# Altium PCB ATmega328P design.PcbDoc
Units mm, origin at the board's own origin, x right, y up, seen from the top; angles counter-clockwise.
Board outline 40.02 x 50 mm, 2 copper layers (Top Layer, Bottom Layer), stack 1.671 mm thick; 30 components, 36 nets, 144 pads, 48 vias.
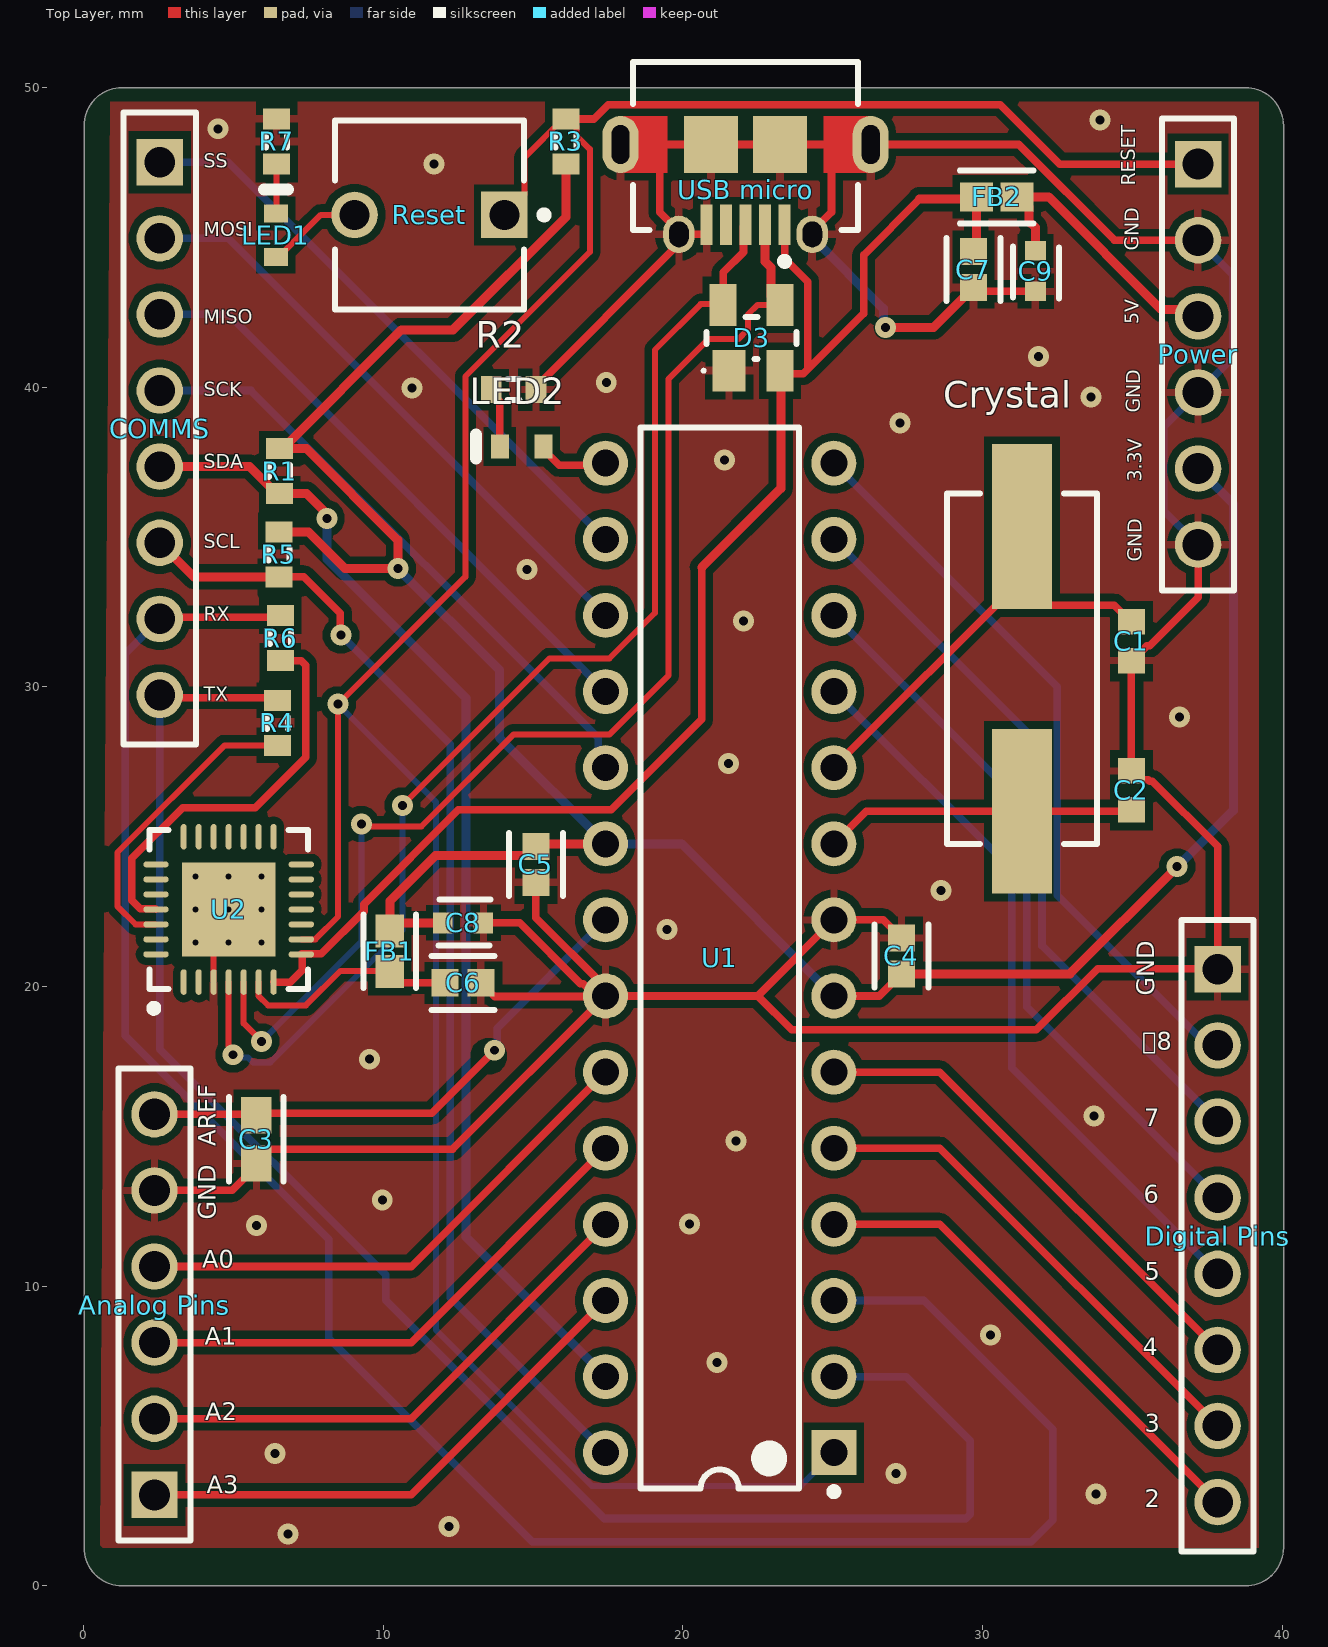
[diagram p0: Top Layer view]
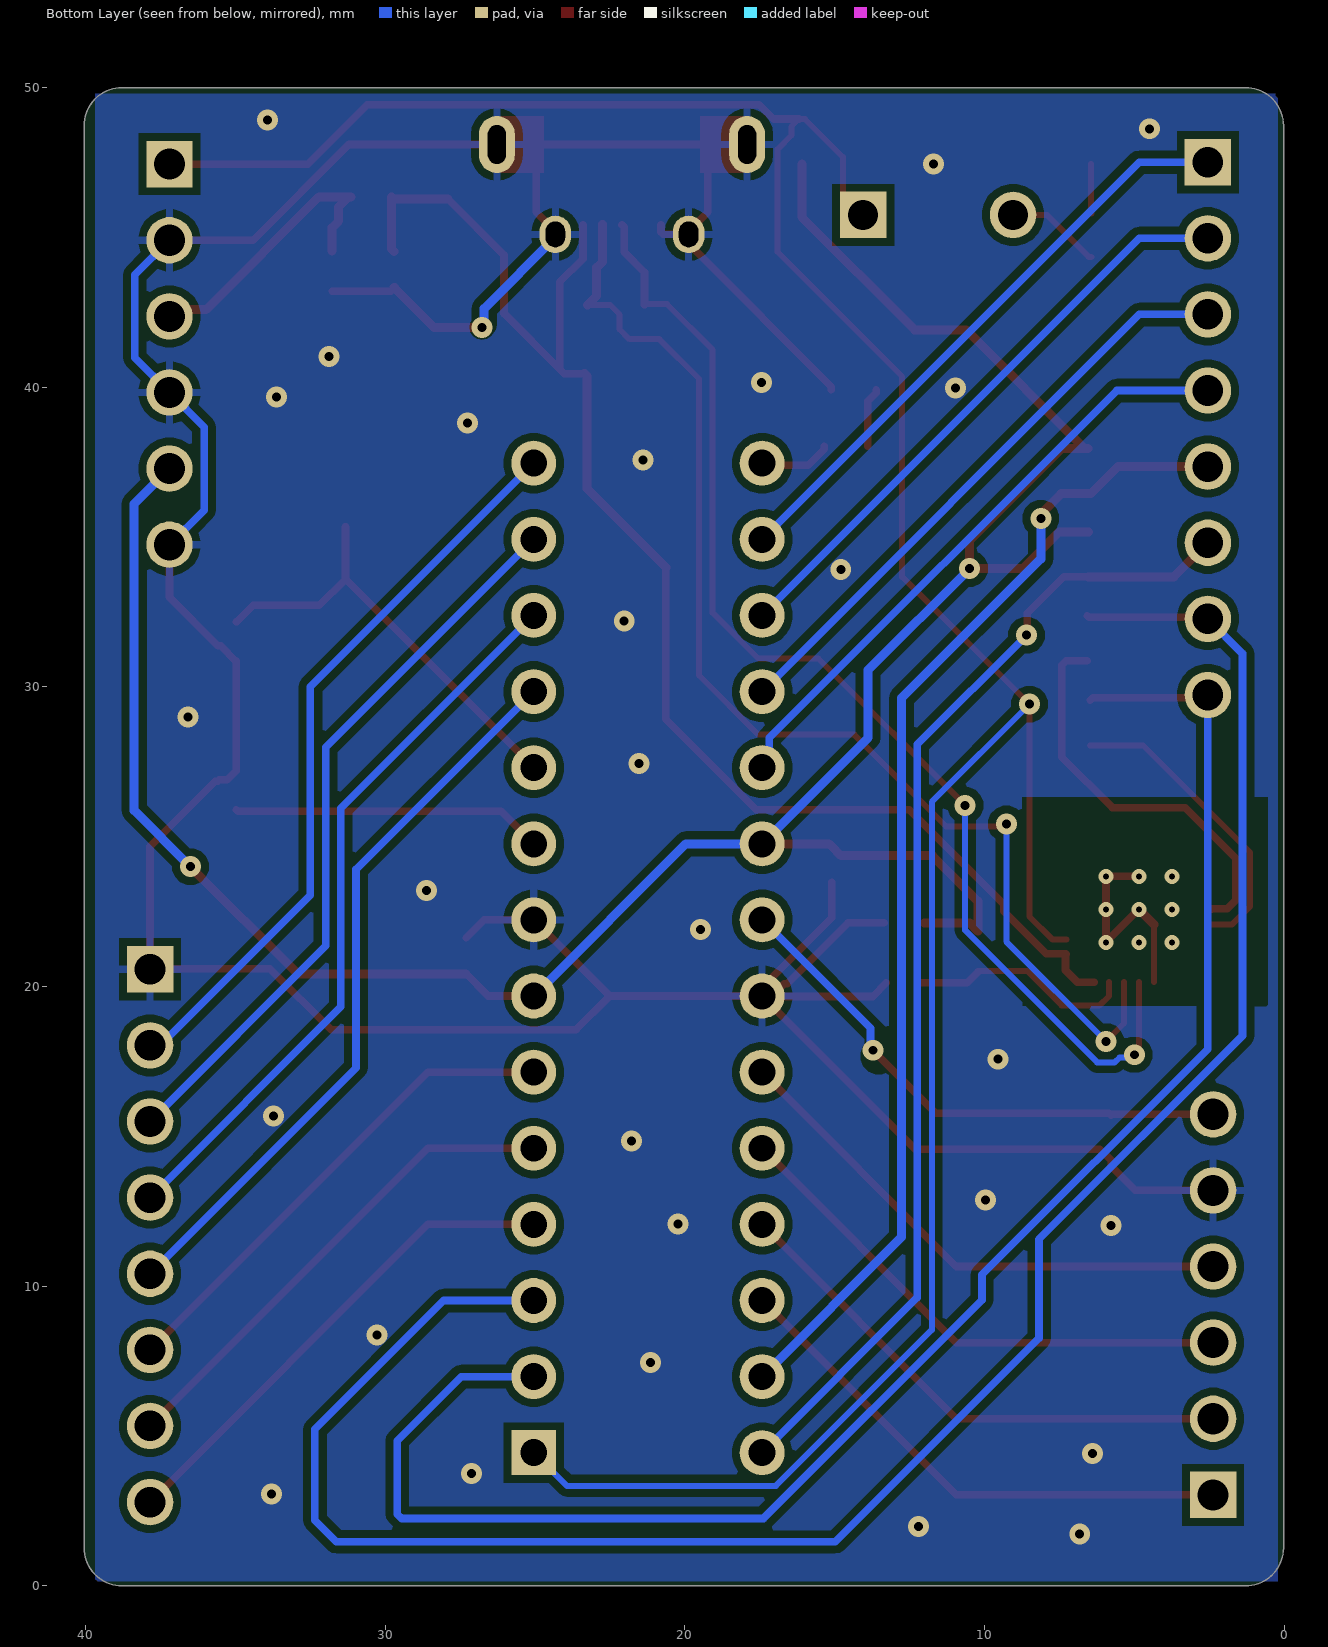
[diagram p1: Bottom Layer view, seen from below]
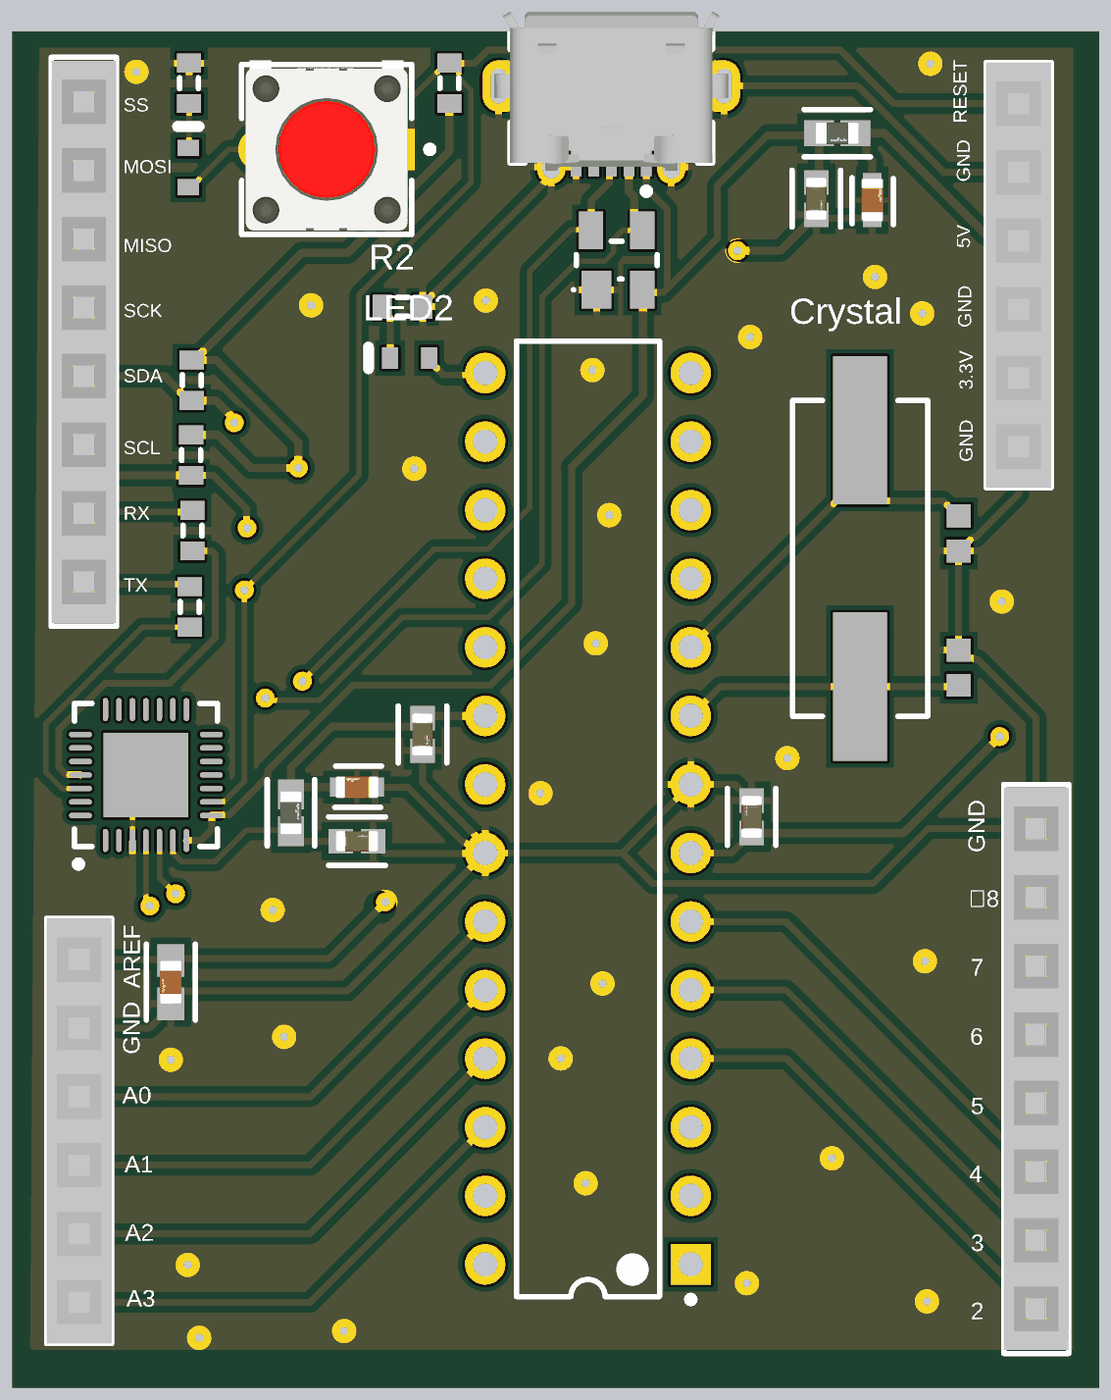
[diagram p2: 3D render of the assembled board from above, using the file's embedded part models]

## Layer stack, top to bottom
Top Solder: solder mask 0.0254, SM-001, Dk 4
Top Layer: signal copper 0.0356
Dielectric 1: dielectric 1.6, FR-4, Dk 4.6
Bottom Layer: signal copper 0.0356
Bottom Solder: solder mask 0.0254, SM-001, Dk 4

## Board outline
0.025,1.27 ccw(c1.295,1.27) 1.295,0 38.78,0 ccw(c38.78,1.27) 40.05,1.27 40.05,48.73 ccw(c38.78,48.73) 38.78,50 1.295,50 ccw(c1.295,48.73) 0.025,48.73

## Design rules (kind name [scope] priority, off if disabled: settings)
Clearance [All] p1: gap=0.254 ignorepadtopadclearanceinfootprint=FALSE except(0: Arc-Hole Track-Hole SMDPad-Hole THPad-Hole Via-Hole Fill-Hole Poly-Hole Region-Hole Text-Hole)
PolygonConnect [All] p1: thpad.connectstyle=Relief thpad.reliefconductorwidth=0.254 thpad.reliefentries=4 thpad.polygonreliefangle="90 Angle" thpad.airgapwidth=0.254 smdpad.connectstyle=Relief smdpad.reliefconductorwidth=0.254 smdpad.reliefentries=4 smdpad.polygonreliefangle="90 Angle" smdpad.airgapwidth=0.254 via.connectstyle=Direct via.reliefconductorwidth=0.254 via.reliefentries=4 via.polygonreliefangle="90 Angle" via.airgapwidth=0.254
RoutingVias [All] p1: holewidth=0.3 width=0.7 viastyle="Through Hole" minholewidth=0.2 minwidth=0.6 maxholewidth=0.3 maxwidth=0.7
SolderMaskExpansion [All] p1: expansion=0.102 istentingtop=FALSE
Width [All] p1: maxlimit=0.3 minlimit=0.2 preferedwidth=0.254
30 further rules are at their usual default settings.

## Components (designator, comment, footprint, x,y, rotation, side; value= is the part's Value field where it differs from the comment)
"Analog Pins" "SSW-106-02-G-S" SMTC-SSW-106-02-X-S 2.374,3.038 r90 top
C1 "22pF" CAPC1608X90X35LL15T15 34.975,31.525 r90 top
C2 "22pf" CAPC1608X90X35LL15T15 34.975,26.55 r270 top
C3 "GRM188R60J106ME47D" FP-GRM188-0_1-e0_2_0_55-IPC_A 5.775,14.902 r270 top
C4 "GRM188R61A226ME15D" FP-GRM188-0_2-IPC_C 27.3,21.024 r90 top
C5 "GRM188R61A226ME15D" FP-GRM188-0_2-IPC_C 15.1,24.075 r270 top
C6 "GRM188R6YA106MA73D" FP-GRM188-0_2-IPC_C 12.676,20.125 r0 top
C7 "GRM188R6YA106MA73D" FP-GRM188-0_2-IPC_C 29.7,43.925 r270 top
C8 "GRM188R60J105KA01D" FP-GRM188-0_1-MFG 12.676,22.125 r180 top
C9 "GRM188R60J105KA01D" FP-GRM188-0_1-MFG 31.775,43.875 r90 top
COMMS "SSQ-108-01-F-S" SMTC-SSQ-108-01-X-S 2.55,47.51 r270 top
Crystal "FOXSDLF/160-20" FOX-FOXSDLF160-20_V 31.325,30.6 r90 top
D3 "SP0503BAHTG" LFUS-SOT143-4_V 22.3,41.65 r90 top
"Digital Pins" "SSQ-108-01-F-S" SMTC-SSQ-108-01-X-S 37.849,20.578 r270 top locked
FB1 "BLM18PG181SN1D" FP-BLM18-0_15-t0_8-IPC_B 10.226,21.175 r90 top
FB2 "BLM18PG181SN1D" FP-BLM18-0_15-t0_8-IPC_B 30.475,46.35 r0 top
LED1 "TLMS1100-GS08" VISH-TLMX1100_V 6.425,45.075 r90 top
LED2 "TLMS1100-GS08" VISH-TLMX1100_V 14.625,38.025 r180 top
Power "SSW-106-02-G-S" SMTC-SSW-106-02-X-S 37.2,47.445 r270 top
R1 "Res3" J1-0603 6.55,37.2 r90 top value=3K
R2 "" J1-0603 14.362,39.919 r0 top value=300Ohm
R3 "0603" J1-0603 16.1,48.2 r270 top value=10K
R4 "Res3" J1-0603 6.475,28.8 r270 top value=300ohm
R5 "Res3" J1-0603 6.525,34.425 r90 top value=3K
R6 "Res3" J1-0603 6.575,31.625 r270 top value=300ohm
R7 "" J1-0603 6.45,48.2 r90 top value=300ohm
Reset "EVQ-21405R" FP-EVQ-21405R-MFG 11.55,45.75 r180 top
U1 "ATmega328P-PU" 28P3 21.235,20.955 r180 top
U2 "CP2102-GM" SLAB-QFN-28-3125x3125TP_N 4.85,22.575 r90 top
"USB micro" "47589-0001" MOLX-47589-0001_V 22.1,46.6 r180 top

## Footprints (in the part's own frame and the unit in brackets; to place one, negate y for a bottom-side part, rotate by r counter-clockwise, add the part's x,y. Pads: shape width x height; smd on the part's side, far side on the other; paste and mask are expansions set on the pad)
28P3 [mm] "28-Pin Plastic Dual In-Line Package (PDIP)"
  rect 1.5x1.5 hole 0.9: 1(-3.81,16.51)
  round 1.5 hole 0.9: 2(-3.81,13.97) 3(-3.81,11.43) 4(-3.81,8.89) 5(-3.81,6.35) 6(-3.81,3.81) 7(-3.81,1.27) 8(-3.81,-1.27) 9(-3.81,-3.81) 10(-3.81,-6.35) 11(-3.81,-8.89) 12(-3.81,-11.43) 13(-3.81,-13.97) 14(-3.81,-16.51) 15(3.81,-16.51) 16(3.81,-13.97) 17(3.81,-11.43) 18(3.81,-8.89) 19(3.81,-6.35) 20(3.81,-3.81) 21(3.81,-1.27) 22(3.81,1.27) 23(3.81,3.81) 24(3.81,6.35) 25(3.81,8.89) 26(3.81,11.43) 27(3.81,13.97) 28(3.81,16.51)
  silkscreen extent -3.94,-17.7 2.65,17.93, body extent -3.6,-17.65 3.6,17.65, height 4.58
CAPC1608X90X35LL15T15 [mm] "Chip Capacitor, 2-Leads, Body 1.60x0.81mm, IPC High Density"
  rect 0.85x0.9 smd: 1(-0.65,0) 2(0.65,0)
  body extent -0.88,-0.48 0.87,0.48, height 0.9
FOX-FOXSDLF160-20_V [mm] "SMD, 2-Leads, Body 5x11.7mm, Height 4.5mm"
  rect 5.5x2 smd: 1(-4.75,0) 2(4.75,0)
  silkscreen extent -5.85,-2.5 5.85,2.5, body extent -5.85,-2.5 5.85,2.5, height 4.5
FP-BLM18-0_15-t0_8-IPC_B [mm]
  rect 1.106x0.958 smd paste+0 mask+0: 1(-0.676,0) 2(0.676,0)
  silkscreen extent -1.23,-0.88 1.23,0.88, body extent -1.48,-0.73 1.48,0.73, height 0.25
FP-EVQ-21405R-MFG [mm]
  rect 1.55x1.55 hole 1 paste-1000 mask+0: A(-2.5,0)
  round 1.55 hole 1 paste-1000 mask+0: B(2.5,0)
  silkscreen extent -3.95,-3.15 3.15,3.15, body extent -3.37,-3.25 3.37,3.25, height 0.25
FP-GRM188-0_1-e0_2_0_55-IPC_A [mm]
  rect 1.208x1.012 smd paste+0 mask+0: 1(-0.802,0) 2(0.802,0)
  silkscreen extent -1.41,-0.91 1.41,0.91, body extent -1.91,-1.01 1.91,1.01, height 0.25
FP-GRM188-0_1-MFG [mm]
  rect 0.65x0.7 smd paste+0 mask+0: 1(-0.675,0) 2(0.675,0)
  silkscreen extent -0.91,-0.78 0.82,0.75, body extent -1.1,-0.55 1.1,0.55, height 0.25
FP-GRM188-0_2-IPC_C [mm]
  rect 0.905x0.906 smd paste+0 mask+0: 1(-0.601,0) 2(0.601,0)
  silkscreen extent -1.05,-0.9 1.05,0.9, body extent -1.15,-0.6 1.15,0.6, height 0.25
J1-0603 [mm] "Chip Resistor, Body 1.6x0.8mm, IPC High Density"
  rect 0.7x0.9 smd: 1(-0.75,0) 2(0.75,0)
  silkscreen extent -0.2,-0.35 0.2,0.35, body extent -0.85,-0.48 0.85,0.48, height 0.9
LFUS-SOT143-4_V [mm] "SOT143, 4-Leads, Body 3.04x1.4mm, Pitch 1.90mm"
  rect 1.4x1.1 smd: 1(-1.1,0.75)
  rect 1.4x0.9 smd: 2(-1.1,-0.95) 3(1.1,-0.95) 4(1.1,0.95)
  silkscreen extent -1.15,-1.5 0.7,1.65, body extent -0.7,-1.52 0.7,1.52, height 1.22
MOLX-47589-0001_V [mm] "SMD, 5-Leads, Body 7.5x5.6mm, Pitch 0.65mm"
  rect 0.4x1.35 smd: 1(-1.3,1.175) 2(-0.65,1.175) 3(0,1.175) 4(0.65,1.175) 5(1.3,1.175)
  oval 1.05x1.25 hole 0.65 slot 0.85 at 90 deg: 6(-2.225,1.5) 7(2.225,1.5)
  oval 1.2x1.9 hole 0.6 slot 1.3 at 90 deg: 8(-4.175,-1.5) 11(4.175,-1.5)
  rect 1.8x1.9 smd: 9(-1.15,-1.5) 10(1.15,-1.5)
  Top Layer region: 2.6,-2.45 4.175,-2.45 4.175,-0.55 2.6,-0.55
  Top Layer region: -2.6,-0.55 -4.175,-0.55 -4.175,-2.45 -2.6,-2.45
  silkscreen extent -3.75,-4.25 3.75,2.52, body extent -4.32,-4.25 4.32,1.64, height 2.74
SLAB-QFN-28-3125x3125TP_N [mm] "QFN, 28-Leads, Body 5x5mm, Pitch 0.5mm, Thermal Pad 3.13x3.13mm, IPC Medium Density"
  oval 0.85x0.2 smd: 1(-2.425,1.5) 2(-2.425,1) 3(-2.425,0.5) 4(-2.425,0) 5(-2.425,-0.5) 6(-2.425,-1) 7(-2.425,-1.5) 15(2.425,-1.5) 16(2.425,-1) 17(2.425,-0.5) 18(2.425,0) 19(2.425,0.5) 20(2.425,1) 21(2.425,1.5)
  oval 0.2x0.85 smd: 8(-1.5,-2.425) 9(-1,-2.425) 10(-0.5,-2.425) 11(0,-2.425) 12(0.5,-2.425) 13(1,-2.425) 14(1.5,-2.425) 22(1.5,2.425) 23(1,2.425) 24(0.5,2.425) 25(0,2.425) 26(-0.5,2.425) 27(-1,2.425) 28(-1.5,2.425)
  rect 3.13x3.13 smd: 29(0,0)
  silkscreen extent -3.42,-2.65 2.65,2.65, body extent -2.5,-2.5 2.5,2.5, height 1
SMTC-SSQ-108-01-X-S [mm] "SQ Post Socket, 1x8 Pins, Vertical, 2.54mm Pitch, Female"
  rect 1.55x1.55 hole 1.02: 1(0,0)
  round 1.55 hole 1.02: 2(2.54,0) 3(5.08,0) 4(7.62,0) 5(10.16,0) 6(12.7,0) 7(15.24,0) 8(17.78,0)
  silkscreen extent -1.65,-1.2 19.43,1.21, body extent -1.52,-1.21 19.3,1.21, height 8.51
SMTC-SSW-106-02-X-S [mm] "SQ Post Socket, 1x6 Pins, Vertical, 2.54mm Pitch, Female"
  rect 1.55x1.55 hole 1.04: 1(0,0)
  round 1.55 hole 1.04: 2(2.54,0) 3(5.08,0) 4(7.62,0) 5(10.16,0) 6(12.7,0)
  silkscreen extent -1.52,-1.2 14.22,1.21, body extent -1.52,-1.21 14.22,1.21, height 8.51
VISH-TLMX1100_V [mm] "SMD, 2-Leads, Body 1.6x0.8mm"
  rect 0.6x0.8 smd: 1(-0.725,0) 2(0.725,0)
  silkscreen extent 1.53,-0.4 1.53,0.4, body extent -0.8,-0.4 0.8,0.4, height 0.65

## Part data
"Analog Pins" Power: library part CMP-1023-00359-1, "SQ Post Socket, Through-hole, Vertical, -55 to 125 degC, 2.54mm Pitch, 6-Pin, Female, RoHS", Manufacturer=Samtec, Temperature Range="-55 to 125 degC", ComponentLink1Description="Manufacturer URL", ComponentLink1URL=http://www.samtec.com, ComponentLink2Description=Datasheet, ComponentLink2URL=http://www.samtec.com/documents/webfiles/pdf/SSW_TH.PDF, ComponentLink3Description="Package Specification", ComponentLink3URL=http://www.samtec.com/documents/webfiles/cpdf/SSW-1XX-XX-XXX-X-XX-XXX-XX-MKT.pdf, DatasheetVersion=F-214, Mounting Technology=Through-hole, Orientation=Vertical, PackageDescription="Assembly, Socket Strip .016 X .031 Tail", PackageReference=SSW-106-02-X-S, PackageVersion="CA, 6/1987", PartNumber=SSW-106-02-G-S, Pitch="2.54 mm", RoHS=True
C1 C2: library part CMP-2006-04016-1, Manufacturer="AVX Interconnect / Elco", Part Number=06031A220KAT2A
C3: library part CMP-2006-02792-2, "Chip Multilayer Ceramic Capacitors for General Purpose, 0603, 0.1uF, X5R, 15%, 20%, 6.3V", Capacitance=10uF, Case Code (Imperial)=0603, Case Code (Metric)=1608, Dielectric=X5R, Max Operating Temperature=85°C, Min Operating Temperature=-55°C, Package Quantity=4000, Tolerance=20%, Voltage=6.3V, Case/Package=0603, Depth=0.8mm, Height=0.8mm, Lead Free="Lead Free", Length=1.6mm, Material=Ceramic, Mount="Surface Mount", Packaging="Tape and Reel", Radiation Hardening=No, REACH SVHC="No SVHC", Termination=SMD/SMT, Thickness=0.035inch, Voltage Rating=6.3V, Voltage Rating (DC)=6.3V, Width=0.031inch
C4 C5: library part CMP-2000-06337-3, "Chip Multilayer Ceramic Capacitors for General Purpose, 0603, 22uF, X5R, 15%, 20%, 10V", Capacitance=22uF, Case Code (Imperial)=0603, Case Code (Metric)=1608, Dielectric=X5R, Max Operating Temperature=85°C, Min Operating Temperature=-55°C, Package Quantity=4000, Tolerance=20%, Voltage Rating=10V, Case/Package=0603, Depth=0.8mm, Height=0.8mm, Lead Free="Lead Free", Length=1.6mm, Material=Ceramic, Mount="Surface Mount", Packaging="Tape and Reel", REACH SVHC="No SVHC", Termination=SMD/SMT, Thickness=0.039inch, Voltage Rating (DC)=10V, Weight=0.000222oz, Width=0.8mm
C6 C7: library part CMP-06035-045466-1, "Chip Multilayer Ceramic Capacitors for General Purpose, 0603, 10uF, X5R, 15%, 20%, 35V", Capacitance=10uF, Case Code (Imperial)=0603, Case Code (Metric)=1608, Dielectric=X5R, Max Operating Temperature=85°C, Min Operating Temperature=-55°C, Tolerance=20%, Voltage Rating=35V, Case/Package=0603, Length=0.063inch, Mount="Surface Mount", Packaging="Tape and Reel", Thickness=0.039inch, Voltage Rating (DC)=35V, Width=0.031inch
C8 C9: library part CMP-2006-02790-2, "CAP CER 1UF 6.3V X5R 0603", Capacitance=1uF, Case Code (Imperial)=0603, Case Code (Metric)=1608, Dielectric=X5R, Dielectric Material=Ceramic, Insulation Resistance=500MR, Max Operating Temperature=85°C, Min Operating Temperature=-55°C, Package Quantity=1, Tolerance=10%, Voltage=6.3V, Case/Package=0603, Depth=0.8mm, Height=0.8mm, Lead Free="Lead Free", Length=1.6mm, Mount="Surface Mount", Packaging="Tape and Reel", Radiation Hardening=No, REACH SVHC="No SVHC", Termination=SMD/SMT, Thickness=0.035inch, Voltage Rating=6.3V, Voltage Rating (DC)=6.3V, Width=0.031inch
COMMS "Digital Pins": library part CMP-1023-00294-1, "SQ Post Socket, Through-hole, Vertical, -55 to 125 degC, 2.54 mm Pitch, 8-Pin, Female, RoHS", Manufacturer=Samtec, Temperature Range="-55 to 125 degC", ComponentLink1Description="Manufacturer URL", ComponentLink1URL=http://www.samtec.com, ComponentLink2Description=Datasheet, ComponentLink2URL=http://www.samtec.com/documents/webfiles/pdf/SSQ_TH.PDF, ComponentLink3Description="Package Specification", ComponentLink3URL=http://www.samtec.com/documents/webfiles/cpdf/SSQ-1XX-XX-XXX-X-XX-XXX-XX-X-MKT.pdf, DatasheetVersion=F-214, Mounting Technology=Through-hole, Orientation=Vertical, PackageDescription="Assembly, Socket Strip .025[0.64] SQ Tail", PackageReference=SSQ-108-01-X-S, PackageVersion="BD, 6/1987", PartNumber=SSQ-108-01-F-S, Pitch="2.54 mm", RoHS=True
Crystal: library part CMP-1749-00001-1, "Resistance Weld SMD Crystal, 16 MHz, +/- 30 ppm, 20 pF, -20 to 70 degC, 2-Pin SMD, RoHS, Tape and Reel", Case\Package=SOT-553-6, Max Operating Temperature="150 degC", Max Supply Voltage="3.3 V", Max Supply Voltage (DC)="6 V", Min Operating Temperature="-55 degC", Min Supply Voltage="1.4 V", Min Supply Voltage (DC)="4 V", Output Current="3 mA", Package Quantity=1, ComponentLink1Description="Manufacturer URL", ComponentLink1URL=http://www.foxonline.com/, ComponentLink2Description=Datasheet, ComponentLink2URL=http://foxonline.com/pdfs/hc49sdlf.pdf, DatasheetVersion=Mar-15, Height="0.55 mm", Interface=I2C, Length="1.6 mm", Mount="Surface Mount", PackageDescription="2-Pin Surface Mount Device, Body 5 x 11.7 mm, Height 4.5 mm", PackageReference=FOX-FOXSDLF160-20, Packaging="Cut Tape", Pins=6, Radiation Hardening=No, REACH SVHC="No SVHC", RoHSCompliant=true, Weight="9.9E-05 oz", Width="1.2 mm"
D3: library part CMP-2000-05191-1, "TVS Diode Array, 30 pF, 30 KV, -40 to 85 degC, 4-Pin SOT143, RoHS, Tape and Reel", Capacitance Value=30pF, Clamping Voltage=8V, Leakage Current=0.1uA, Manufacturer=Littelfuse, Operating Temp Range=-40Cto85C, Operating Temperature Classification=Industrial, Operating Temperature Max Deg. C=85C, Operating Temperature Min Deg. C=-40C, Package / Case=SOT-143, Reverse Stand-off Voltage=5.5(Min)V, Working Voltage=5.5V, Working Voltage (Max)=5.5V(Min), Clamping Voltage (Max)=8V, Configuration=Triple, Datasheet URL=https://datasheet.ciiva.com/15143/getdatasheetpartid-116020-15143550.pdf, Datasheet Version=Dec-13, Direction Type=Uni-Directional, Leakage Current (Max)=0.1uA, Manufacturer URL=http://www.littelfuse.com/, Mounting=SurfaceMount, Mounting Style=SurfaceMount, Number of Elements=3, Package Type=SOT-143, Packaging=TapeandReel, Pin Count=3+Tab, Polarity=Uni-Directional, Product Depth (mm)=1.4mm, Product Height (mm)=1.05mm, Product Length (mm)=3.04mm, Rad Hardened=No, Suppressor Type=TVS
FB1 FB2: library part CMP-0686-00566-4, "Chip Ferrite Bead, 0603, 180Ω @ 100MHz, 0.09Ω, 25%, 1.5A", Case Code (Imperial)=0603, Case Code (Metric)=1608, Current Rating=1.5A, DC Resistance (DCR)=90mR, Max Operating Temperature=125°C, Min Operating Temperature=-55°C, Package Quantity=1, Test Frequency=100MHz, Tolerance=25%, Case/Package=0603, Core Material=Ferrite, DC Current=1.5A, Depth=0.8mm, Height=0.8mm, Impedance=180R, Lead Free="Lead Free", Length=1.6mm, Material=Ferrite, Max Current Rating=1.5A, Max DC Current=1.5A, Number of Circuits=1, Number of Lines=1, Number of Pins=2, Packaging="Tape and Reel", Radiation Hardening=No, REACH SVHC="No SVHC", Shielding=Unshielded, Termination=SMD/SMT, Width=0.8mm
LED1 LED2: library part CMP-1666-00027-1, "LED, RED, 2.1 V, -40 to 100 degC, 2-Pin SMD (0603), RoHS, Tape and Reel", Capacitance="12 pF", Case Code (Imperial)=0603, Case Code (Metric)=1608, Max Operating Temperature=125degC, Min Operating Temperature=-55degC, Package Quantity=4000, Resistance="100000000000 Ohm", Tolerance=5%, Type (Capacitors)=C0G, Voltage Rating="50 V", Case/Package=0603, ComponentLink1Description="Manufacturer URL", ComponentLink1URL=http://www.vishay.com/, ComponentLink2Description=Datasheet, ComponentLink2URL=http://www.vishay.com/docs/83173/tlmb1100.pdf, DatasheetVersion="Rev. 2.7, 03/2016", Height="0.8 mm", Length="1.6 mm", Mount="Surface Mount", PackageDescription="2-Pin Surface Mount Device, Body 1.6 x 0.8 mm", PackageReference=TLMX1100, Packaging="Tape and Reel", Pins=2, Radiation Hardening=No, REACH SVHC="No SVHC", RoHSCompliant=True, Voltage Rating (DC)="50 V", Width="0.8 mm"
R1 R4 R5 R6: "Resistor", LatestRevisionDate=29-May-2009, LatestRevisionNote="IPC-7351 Footprint Added.", PackageDescription="Chip Resistor", PackageReference=J1-0603, Published=8-Jun-2000, Publisher="Altium Limited"
R2 R3 R7: library part Res3, "Resistor", LatestRevisionDate=29-May-2009, LatestRevisionNote="IPC-7351 Footprint Added.", PackageDescription="Chip Resistor", PackageReference=J1-0603, Published=8-Jun-2000, Publisher="Altium Limited"
Reset: library part CMP-00287-55650591-1, "EVQ-21405R Switch Tactile N.O. SPST Round Button PC Pins 0.02A 15VDC 1.3N Thru-Hole Radial T/R", Case/Package=Radial, Contact Current Rating=20mA, Contact Resistance=50mΩ, Max Operating Temperature=70°C, Max Voltage Rating (DC)=15V, Min Operating Temperature=-20°C, Operating Force=1.3N, Actuator Length=1.6mm, Contact Plating=Silver, Current Rating=20mA, Depth=6mm, Electrical Life=100kcycles, Height=5mm, Illumination Type="Illuminated, Non-Illuminated", Lead Free="Lead Free", Length=6mm, Life (Cycles)=100kcycles, Max Current Rating=20mA, Mechanical Life=100kcycles, Mount="Through Hole", NexarPartId=55650591, Number of Positions=2, Orientation=Straight, Radiation Hardening=No, REACH SVHC=Unknown, RoHS=Compliant, Switch Function=Off-Mom, Switch Travel=250µm, Termination="PC Pin", Throw Configuration=SPST, Voltage Rating (DC)=15V, Weight=1.451496g, Width=6mm
U1: library part CMP-0095-00013-2, "8-bit AVR Microcontroller, 32KB Flash, 1KB EEPROM, 2KB SRAM, 28-pin PDIP, Industrial Grade (-40°C to 85°C)", ComponentLink1Description="Manufacturer URL", ComponentLink1URL=http://www.atmel.com/, ComponentLink2Description="ATmega48A/48PA/88A/88PA/168A/168PA/328/328P Datasheet", ComponentLink2URL=http://www.atmel.com/dyn/resources/prod_documents/8271.pdf, ComponentLink3Description="ATmega48A/48PA/88A/88PA/168A/168PA/328/328P Summary", ComponentLink3URL=http://www.atmel.com/dyn/resources/prod_documents/8271S.pdf, DatasheetVersion="revD, May-2011", PackageDescription="28-lead (0.300\"/7.62mm Wide) Plastic Dual Inline Package (PDIP)", PackageReference=28P3, PackageVersion="revB, Sep-2001", RevisionNote="DatasheetVersion updated. URLs added."
U2: library part CMP-0511-00012-1, "Single-Chip USB to UART Bridge, 1024 Bytes EEPROM, -40 to 85 degC, 28-pin QFN, Tube", Manufacturer="Silicon Labs", Code_IPC=J-STD-020C, Code_JEDEC=MO-220, ComponentLink1Description="Manufacturer URL", ComponentLink1URL=http://www.silabs.com/, ComponentLink2Description=Datasheet, ComponentLink2URL=http://www.silabs.com/Support%20Documents/TechnicalDocs/CP2102-9.pdf, ComponentLink3Description="Package Specification", ComponentLink3URL=http://www.silabs.com/Support%20Documents/TechnicalDocs/C8051T61x.pdf, DatasheetVersion="Rev. 1.5", EEPROM="1024 Bytes", Internal Oscillator=TRUE, Mounting Technology="Surface Mount", PackageDescription="28-Pin Quad-Flat No-Leads Package, Body 5 x 5 mm, Pitch 0.5 mm", PackageReference=QFN-28, PartNumber=CP2102-GM, Sub-Family="USB Bridges"
"USB micro": library part CMP-2000-05610-1, "Right Angle Female Type AB Micro USB Connector, 30 V, 1.8 A, -30 to 85 degC, RoHS, Tape and Reel", Color=Black, Current Rating=1.8A, Manufacturer=Molex, Operating Temperature Range=-20Cto+85C, Package Description="Micro USB Connector, Pitch 0.65 mm, 5 Positions, Body 7.5 x 5.6 mm", Voltage Rating=30VAC, Brand=Molex, Connector Type=MicroUSBTypeABreceptacle, Contact Material=CopperAlloy, Contact Plating=Gold, Datasheet URL=http://www.molex.com/webdocs/datasheets/pdf/en-us/0475890001_IO_CONNECTORS.pdf, Datasheet Version=12/2016, Gender=Female, Manufacturer URL=http://www.molex.com/, Mounting Angle=Right, Mounting Technology=SurfaceMount, Number of Contacts=5Contact, Number of Ports=1Port, Package Reference=47589-0001, Package URL=http://www.molex.com/pdm_docs/sd/475890001_sd.pdf, Packaging=Reel, Product=MicroUSBTypeABConnectors, Product Category=USBConnectors, RoHS=True, Series=47589, Standard=USB, Termination Style=SMD/SMT

## Via types
v1: diameter 0.7, hole 0.3, Top Layer to Bottom Layer, 39 vias
v2: diameter 0.5, hole 0.2, Top Layer to Bottom Layer, 9 vias

## Nets (pads, with @x,y where several pads share a name; then routed paths per layer and width w, separated by ;. In a path a pad name is that pad's centre, name@x,y a point inside that pad or via, vN(x,y) a via of type N, cw(c..) or ccw(c..) an arc to the next point about the centre after c; other vN are vias at no path point)
2: "Digital Pins.8" U1.4 | length 16.6
  Top Layer w0.254: U1.4 28.582,12.065 37.849,2.798
3: "Digital Pins.7" U1.5 | length 16.6
  Top Layer w0.254: U1.5 28.582,14.605 37.849,5.338
3.3V: C4.1 C5.1 C8.2 FB1.2 Power.5 R1.2 R3.2 R5.2 U1.7 U1.20 | length 85.5
  Top Layer w0.254: U1.7 26.561,19.685 C4.1
  Top Layer w0.3: R5.2 7.509,35.175 8.734,33.95 v1(10.5,33.95) 10.5,34.9 7.45,37.95 R1.2@6.65,37.95 ; R1.2 R1.2@6.65,37.95 ; C8.2 10.5,22.125 FB1.2 10.226,22.854 11.744,24.373 14.797,24.373 C5.1 15.189,24.765 U1.20 ; R3.2 16.1,45.679 12.336,41.914 10.614,41.914 R1.2@6.65,37.95 ; C4.1 32.924,20.424 v1(36.5,24)
  Bottom Layer w0.3: v1(10.5,33.95) 13.886,30.564 13.886,28.304 U1.20 19.965,24.765 U1.7 ; v1(36.5,24) 38.379,25.879 38.379,36.106 Power.5
4: "Digital Pins.6" U1.6 | length 16.6
  Top Layer w0.254: U1.6 28.582,17.145 37.849,7.878
5: "Digital Pins.5" U1.11 | length 24.7
  Bottom Layer w0.254: U1.11 30.975,23.915 30.975,17.292 37.849,10.418
5V: C9.2 FB2.2 Power.3 | length 9.7
  Top Layer w0.3: FB2.2 FB2.2@31.225,46.35 ; C9.2 31.775,45.325 31.554,45.546 31.554,46.021 FB2.2@31.225,46.35 ; Power.3 36.975,42.59 35.975,42.59 32.215,46.35 FB2.2@31.225,46.35
6: "Digital Pins.4" U1.12 | length 24.7
  Bottom Layer w0.254: U1.12 31.483,25.947 31.483,19.324 37.849,12.958
7: "Digital Pins.3" U1.13 | length 24.7
  Bottom Layer w0.254: U1.13 31.991,27.979 31.991,21.356 37.849,15.498
8: "Digital Pins.2" U1.14 | length 24.9
  Bottom Layer w0.254: U1.14 32.499,30.011 32.499,23.051 37.512,18.038 37.849,18.038
A0: "Analog Pins.4" U1.23 | length 17.7
  Top Layer w0.254: 2.374,10.658 10.938,10.658 U1.23
A1: "Analog Pins.3" U1.24 | length 17.7
  Top Layer w0.254: 2.374,8.118 10.938,8.118 U1.24
A2: "Analog Pins.2" U1.25 | length 17.7
  Top Layer w0.254: 2.374,5.578 10.938,5.578 U1.25
A3: "Analog Pins.1" U1.26 | length 17.7
  Top Layer w0.254: 2.374,3.038 10.938,3.038 U1.26
AREF: "Analog Pins.6" C3.1 U1.21 | length 18.1
  Top Layer w0.254: 2.374,15.738 5.74,15.738 C3.1 5.846,15.775 11.629,15.775 13.725,17.871 v1(13.725,17.875)
  Bottom Layer w0.254: v1(13.725,17.875) 13.806,17.956 13.806,18.606 U1.21
GND: "Analog Pins.5" "Digital Pins.1" "USB micro.5" "USB micro.6" "USB micro.7" "USB micro.8" "USB micro.9" "USB micro.10" "USB micro.11" C1.1 C2.1 C3.2 C4.2 C5.2 C6.2 C7.2 C8.1 C9.1 D3.1 Power.2 Power.4 Power.6 R2.2 R7.2 U1.8 U1.22 U2.3 U2.29 | length 141.3
  Top Layer w0.2: U2.3 U2.29@4.35,22.075
  Top Layer w0.254: 2.374,13.198 4.971,13.198 5.775,14.002 C3.2 5.775,14.198 6.154,14.577 12.317,14.577 U1.22@17.408,19.668 ; v2(4.85,22.575) v2(5.95,21.475) v2(5.95,22.575) v2(5.95,23.675) v2(4.85,23.675) ; C6.2 13.733,19.668 U1.22@17.007,19.668 ; C8.1 14.557,22.125 16.591,20.091 16.682,20.091 17.007,19.766 U1.22@17.007,19.668 ; C5.2 15.1,22.3 17.425,19.975 U1.22 ; R2.2 15.112,40.019 19.723,44.63 19.723,44.948 19.875,45.1 ; 17.925,48.1 18.875,48.1 ; 20.8,45.425 20.8,45.173 20.727,45.1 19.875,45.1 ; 24.325,45.1 24.325,45.2 24.966,45.841 24.966,47.291 25.775,48.1 ; C4.2 26.699,22.225 U1.8 22.505,19.685 ; C7.2 29.824,43.2 C9.1 ; Power.6 37.2,32.986 35.583,31.369 35.494,31.369 35,30.875 C1.1 C2.1 35.273,26.902 35.534,26.902 35.586,26.85 35.675,26.85 37.849,24.676 37.849,20.578 37.827,20.6 33.851,20.6 31.805,18.554 23.636,18.554 22.505,19.685 ; Power.2 34.411,44.905 31.216,48.1 26.275,48.1 25.775,48.1 ; U1.22@17.007,19.668 U1.22@17.408,19.668 ; U1.22@17.408,19.668 U1.22 ; U1.22 22.505,19.685 ; 18.875,48.1 20.95,48.1 23.25,48.1 25.775,48.1 ; 18.875,48.1 19.234,47.741 19.234,45.841 19.875,45.2 19.875,45.1
  Top Layer w0.3: U2.29@4.35,22.075 v2(4.85,22.575) ; v1(26.775,42) 28.375,42 C7.2
  Bottom Layer w0.254: Power.6 36.044,35.901 36.044,38.669 Power.4 38.356,40.981 38.356,43.749 Power.2
  Bottom Layer w0.3: 24.325,45.1 24.325,45 26.698,42.627 26.698,42.077 v1(26.775,42)
  other v1: 6.825,1.725 12.2,1.975 33.8,3.075 27.125,3.75 6.4,4.425 21.15,7.45 30.275,8.375 5.775,12.025 20.225,12.075 9.975,12.875 21.775,14.85 33.725,15.675 9.55,17.575 19.475,21.9 28.625,23.2 21.525,27.45 36.575,29 22.025,32.2 14.8,33.925 21.4,37.575 27.25,38.8 33.625,39.675 10.975,39.975 17.45,40.15 31.875,41.025 11.7,47.45 4.5,48.625 33.925,48.925
  other v2: 3.75,21.475 4.85,21.475 3.75,22.575 3.75,23.675
MISO: COMMS.3 U1.18 | length 20.1
  Bottom Layer w0.254: COMMS.3 4.84,42.43 U1.18
MOSI: COMMS.2 U1.17 | length 20.1
  Bottom Layer w0.254: COMMS.2 4.84,44.97 U1.17
NetC1_2: C1.2 Crystal.2 U1.10 | length 14.9
  Top Layer w0.254: U1.10 25.045,27.32 Crystal.2@31.325,33.6 ; Crystal.2 Crystal.2@31.325,33.6 ; C1.2 34.95,32.175 34.398,32.727 32.198,32.727 Crystal.2@31.325,33.6
NetC2_2: C2.2 Crystal.1 U1.9 | length 10.4
  Top Layer w0.254: U1.9 26.13,25.85 Crystal.1 34.925,25.85 C2.2
NetD3_3: "USB micro.2" D3.3 U2.5 | length 41
  Top Layer w0.2: U2.5 5.35,18.775 v1(5.95,18.175) ; v1(9.275,25.425) 9.354,25.346 11.286,25.346 14.349,28.409 17.55,28.409 19.529,30.388 19.529,40.28 20.853,41.604 21.855,41.604 22.177,41.927 22.177,42.427 22.5,42.75 D3.3
  Top Layer w0.3: 22.75,45.425 22.75,44.188 22.95,43.988 22.95,43.05 D3.3
  Bottom Layer w0.2: v1(5.95,18.175) 9.275,21.5 v1(9.275,25.425)
NetD3_4: "USB micro.3" D3.4 U2.4 | length 40
  Top Layer w0.2: U2.4 4.85,18.01 5,17.86 v1(5,17.725) ; v1(10.65,26.05) 15.549,30.949 17.55,30.949 19.075,32.474 19.075,41.25 20.6,42.775 21.325,42.775 D3.4
  Top Layer w0.254: D3.4 21.35,43.831 22.031,44.512 22.031,45.356 22.1,45.425
  Bottom Layer w0.2: v1(5,17.725) 5.096,17.629 5.5,17.629 5.658,17.471 6.242,17.471 10.65,21.879 v1(10.65,26.05)
NetLED1_1: LED1.1 Reset.B | length 3.2
  Top Layer w0.2: LED1.1 6.525,44.35 7.925,45.75 Reset.B
NetLED1_2: LED1.2 R7.1 | length 1.7
  Top Layer w0.2: LED1.2 6.45,45.825 R7.1
NetLED2_1: LED2.1 U1.15 | length 2.4
  Top Layer w0.254: LED2.1 15.35,37.925 15.882,37.393 17.353,37.393 U1.15
NetLED2_2: LED2.2 R2.1 | length 2
  Top Layer w0.254: R2.1 13.612,39.819 13.9,39.531 LED2.2
RESET: Power.1 R3.1 Reset.A U1.1 U2.9 | length 96.3
  Top Layer w0.2: U2.9 7.742,21.575 8.5,22.333 v1(8.5,29.425) 12.75,33.675 12.75,40.358 16.904,44.512 16.904,47.947 16.45,48.401 16.45,48.7 16.2,48.95 R3.1 16,48.95 14.725,47.675 14.725,46.425 Reset.A
  Top Layer w0.254: R3.1@16.2,48.95 17.038,48.95 17.519,49.431 30.604,49.431 32.59,47.445 Power.1
  Bottom Layer w0.2: v1(8.5,29.425) 11.763,26.162 11.763,8.546 16.968,3.341 23.941,3.341 U1.1
RX: COMMS.8 R4.1 U1.2 | length 57.8
  Top Layer w0.254: COMMS.8 2.64,29.64 6.385,29.64 R4.1
  Bottom Layer w0.254: COMMS.8 2.55,17.916 10.088,10.378 10.088,9.54 17.378,2.25 29.451,2.25 29.6,2.399 29.6,4.85 27.465,6.985 U1.2
RXD: R4.2 U2.26 | length 10.2
  Top Layer w0.2: U2.26 1.74,22.075 1.138,22.677 1.138,24.473 4.714,28.05 R4.2
SCK: COMMS.4 U1.19 | length 20.5
  Bottom Layer w0.254: COMMS.4 5.594,39.89 17.187,28.297 17.187,27.543 U1.19
SCL: COMMS.6 R5.1 U1.28 | length 38.7
  Top Layer w0.254: R5.1 7.356,33.675 8.575,32.456 8.575,31.75 v1(8.6,31.725)
  Top Layer w0.3: COMMS.6 3.685,33.675 R5.1
  Bottom Layer w0.254: v1(8.6,31.725) 12.244,28.081 12.244,9.626 U1.28
SDA: COMMS.5 R1.1 U1.27 | length 38.9
  Top Layer w0.3: COMMS.5 5.55,37.35 6.45,36.45 R1.1 7.45,36.45 8.048,35.852 8.048,35.702 v1(8.125,35.625)
  Bottom Layer w0.3: v1(8.125,35.625) 8.125,34.275 12.775,29.625 12.775,11.635 U1.27
SS: COMMS.1 U1.16 | length 20.1
  Bottom Layer w0.254: COMMS.1 4.84,47.51 U1.16
TX: COMMS.7 R6.1 U1.3 | length 70.8
  Top Layer w0.254: COMMS.7 2.603,32.322 6.522,32.322 R6.1
  Bottom Layer w0.254: COMMS.7 1.394,31.114 1.394,18.353 8.186,11.561 8.186,8.264 14.978,1.472 31.632,1.472 32.349,2.188 32.349,5.226 28.05,9.525 U1.3
TXD: R6.2 U2.25 | length 13.5
  Top Layer w0.254: U2.25 2.406,22.594 1.901,22.594 1.619,22.876 1.619,24.274 3.312,25.967 5.731,25.967 7.424,27.66 7.424,30.726 7.275,30.875 R6.2
VBUS: "USB micro.1" C7.1 D3.2 FB2.1 U2.7 U2.8 | length 48.1
  Top Layer w0.254: U2.7 6.9,20.15 7.3,20.55 U2.8@7.3,21.048 ; U2.8 7.294,21.094 7.941,21.094 9.365,22.518 9.365,22.745 12.517,25.896 17.615,25.896 20.638,28.919 20.638,33.989 ; D3.2@23.35,40.45 24.026,40.45 24.175,40.599 ; 23.4,45.425 23.4,44.289 24.175,43.514 24.175,40.599 ; 27.9,46.274 26.038,44.412 26.038,42.461 24.175,40.599
  Top Layer w0.3: 20.638,33.989 23.275,36.626 23.275,40.375 D3.2@23.35,40.45 ; 27.9,46.274 29.723,46.274 FB2.1 29.799,44.624 C7.1
VDD: C6.1 FB1.1 U2.6 | length 7.5
  Top Layer w0.2: U2.6 5.85,19.683 6.162,19.371 7.427,19.371 8.581,20.525 10.2,20.525 FB1.1
  Top Layer w0.254: FB1.1 10.226,20.477 10.578,20.125 C6.1
pads on no net: "USB micro.4" U2.1 U2.2 U2.10 U2.11 U2.12 U2.13 U2.14 U2.15 U2.16 U2.17 U2.18 U2.19 U2.20 U2.21 U2.22 U2.23 U2.24 U2.27 U2.28

## Polygon pours and split planes (outlines as drawn)
GND on Top Layer "GND_L01_P000" (solid, pour order 0): 0.893,49.525 39.225,49.525 39.225,1.27 0.557,1.27
GND on Bottom Layer "GND_L02_P001" (solid, pour order 1): 0.3,49.8 39.675,49.8 39.675,0.225 39.6,0.15 0.225,0.15 0.225,49.65 0.3,49.725

## Other copper
Bottom Layer:
  pour cut-out: 0.55,26.325 8.75,26.325 8.75,19.35 0.6,19.35 0.55,19.4

## Silkscreen, mask and mechanical layers (free items; w line width, h text height)
Top Overlay:
  text "SS" at 4.017,47.157 h0.8
  text "RESET" at 35.266,46.725 h0.8 r90
  text "MOSI" at 4.017,44.871 h0.8
  text "GND" at 35.391,44.55 h0.8 r90
  text "5V" at 35.391,42.1 h0.8 r90
  text "MISO" at 4.017,41.95 h0.8
  text "SCK" at 4.017,39.537 h0.8
  text "GND" at 35.441,39.15 h0.8 r90
  text "SDA" at 4.017,37.124 h0.8
  text "3.3V" at 35.491,36.85 h0.8 r90
  text "SCL" at 4.017,34.457 h0.8
  text "GND" at 35.491,34.175 h0.8 r90
  text "RX" at 4.017,32.035 h0.8
  text "TX" at 4.017,29.368 h0.8
  text "GND" at 35.939,19.7 h1 r90
  text "8" at 35.334,17.689 h1
  text "7" at 35.409,15.146 h1
  text "AREF" at 4.625,14.675 h1 r90
  text "6" at 35.392,12.587 h1
  text "GND" at 4.614,12.225 h1 r90
  text "A0" at 3.975,10.411 h1
  text "5" at 35.423,10.016 h1
  text "A1" at 4.05,7.85 h1
  text "4" at 35.36,7.493 h1
  text "A2" at 4.075,5.325 h1
  text "3" at 35.423,4.94 h1
  text "A3" at 4.125,2.886 h1
  text "2" at 35.419,2.417 h1
Board out:
  lines w0.254: 0.025,1.27 ccw(c1.295,1.27) 1.295,0 38.78,0 ccw(c38.78,1.27) 40.05,1.27 40.05,48.73 ccw(c38.78,48.73) 38.78,50 2.8,50 1.295,50 ccw(c1.295,48.73) 0.025,48.73 0.025,1.27